# Altium PCB ESP_Circuit2.PcbDoc
Units mm, origin at the board's own origin, x right, y up, seen from the top; angles counter-clockwise.
Board outline 68.58 x 63.5 mm, 2 copper layers (Top Layer, Bottom Layer); 17 components, 19 nets, 64 pads, 0 vias.
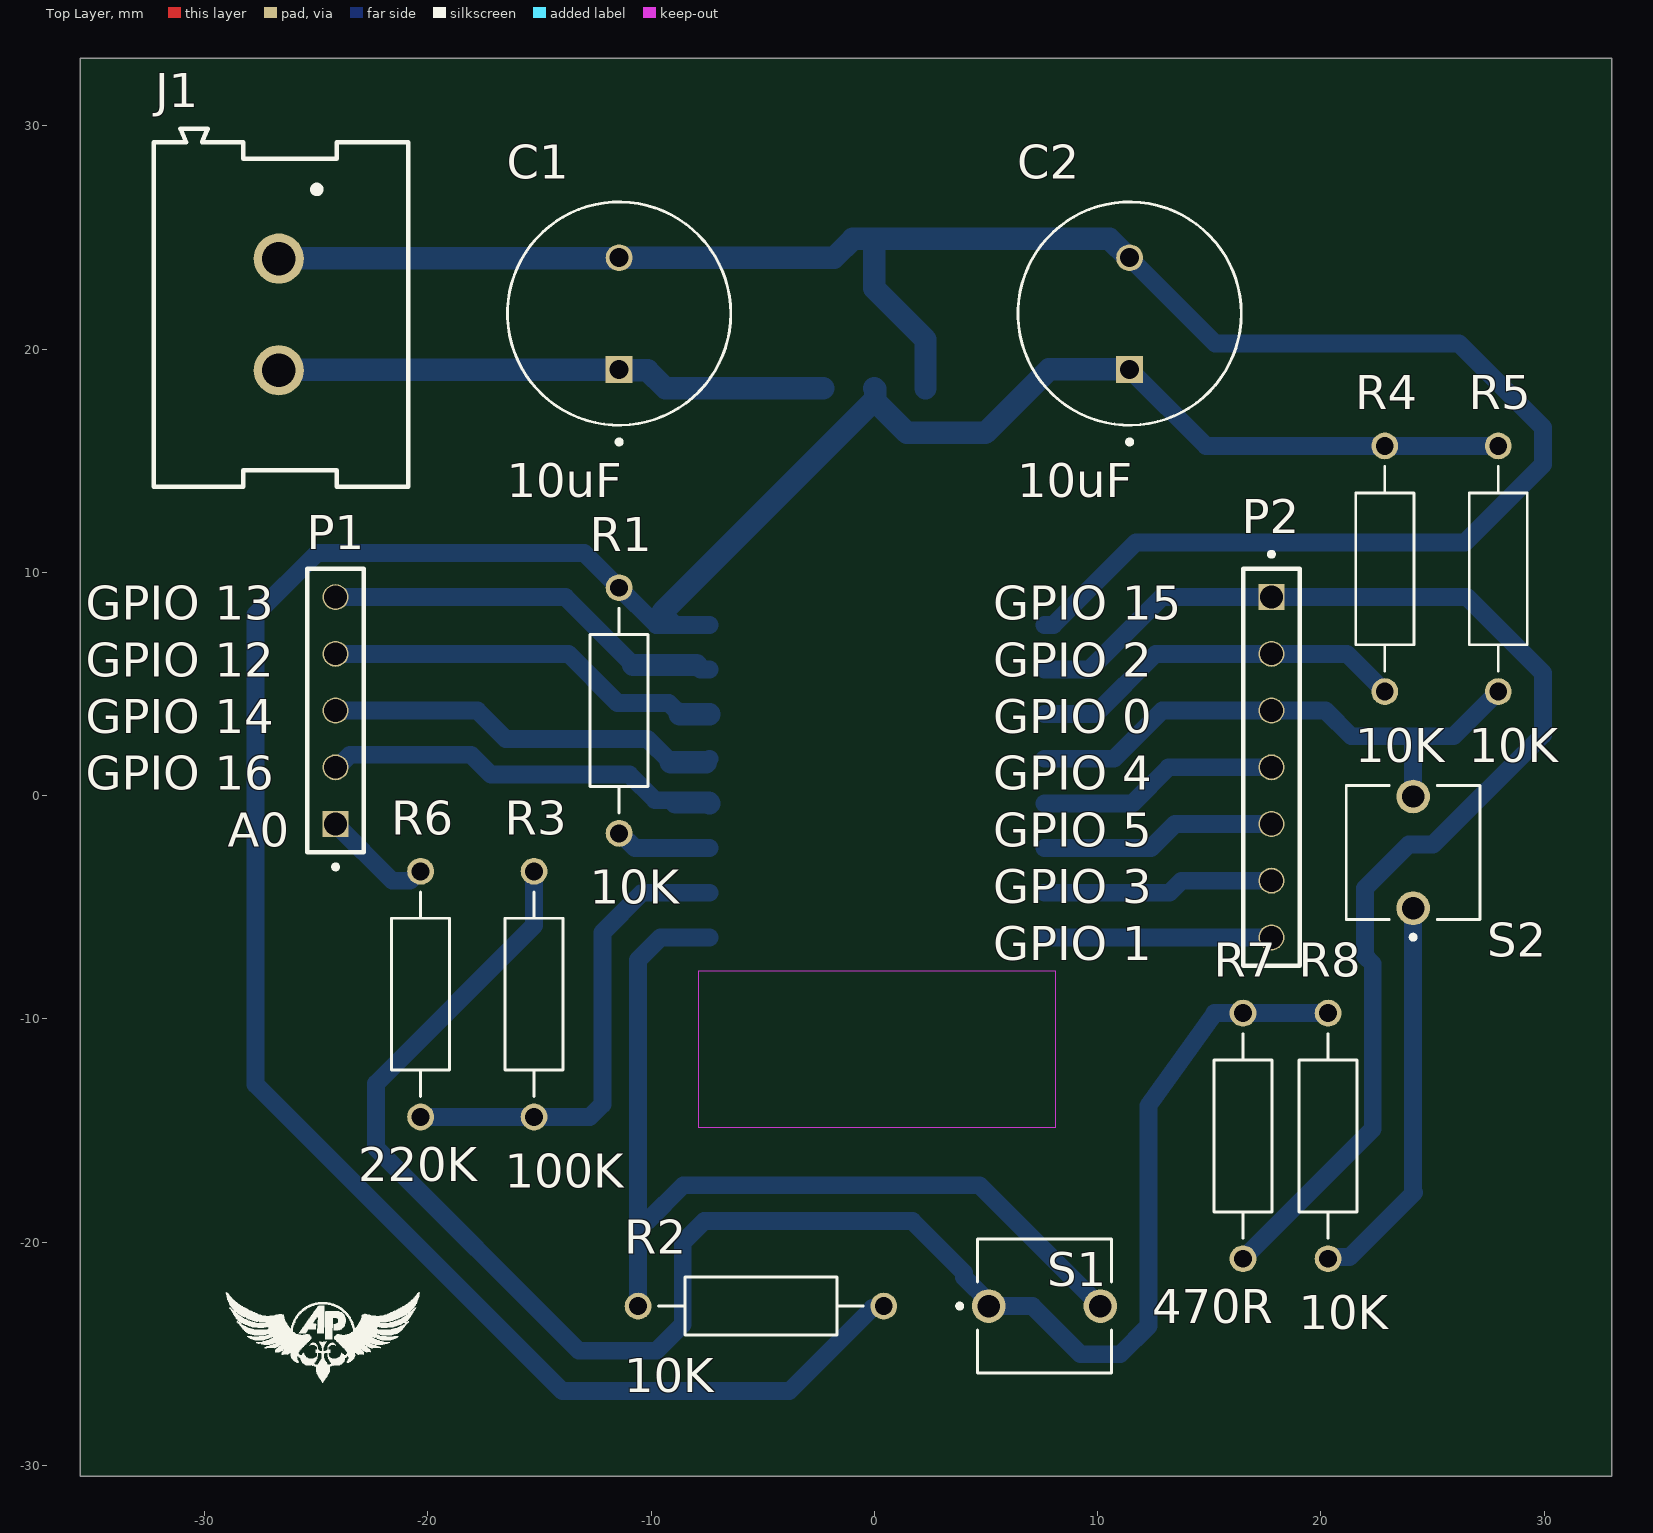
[diagram p0: Top Layer view]
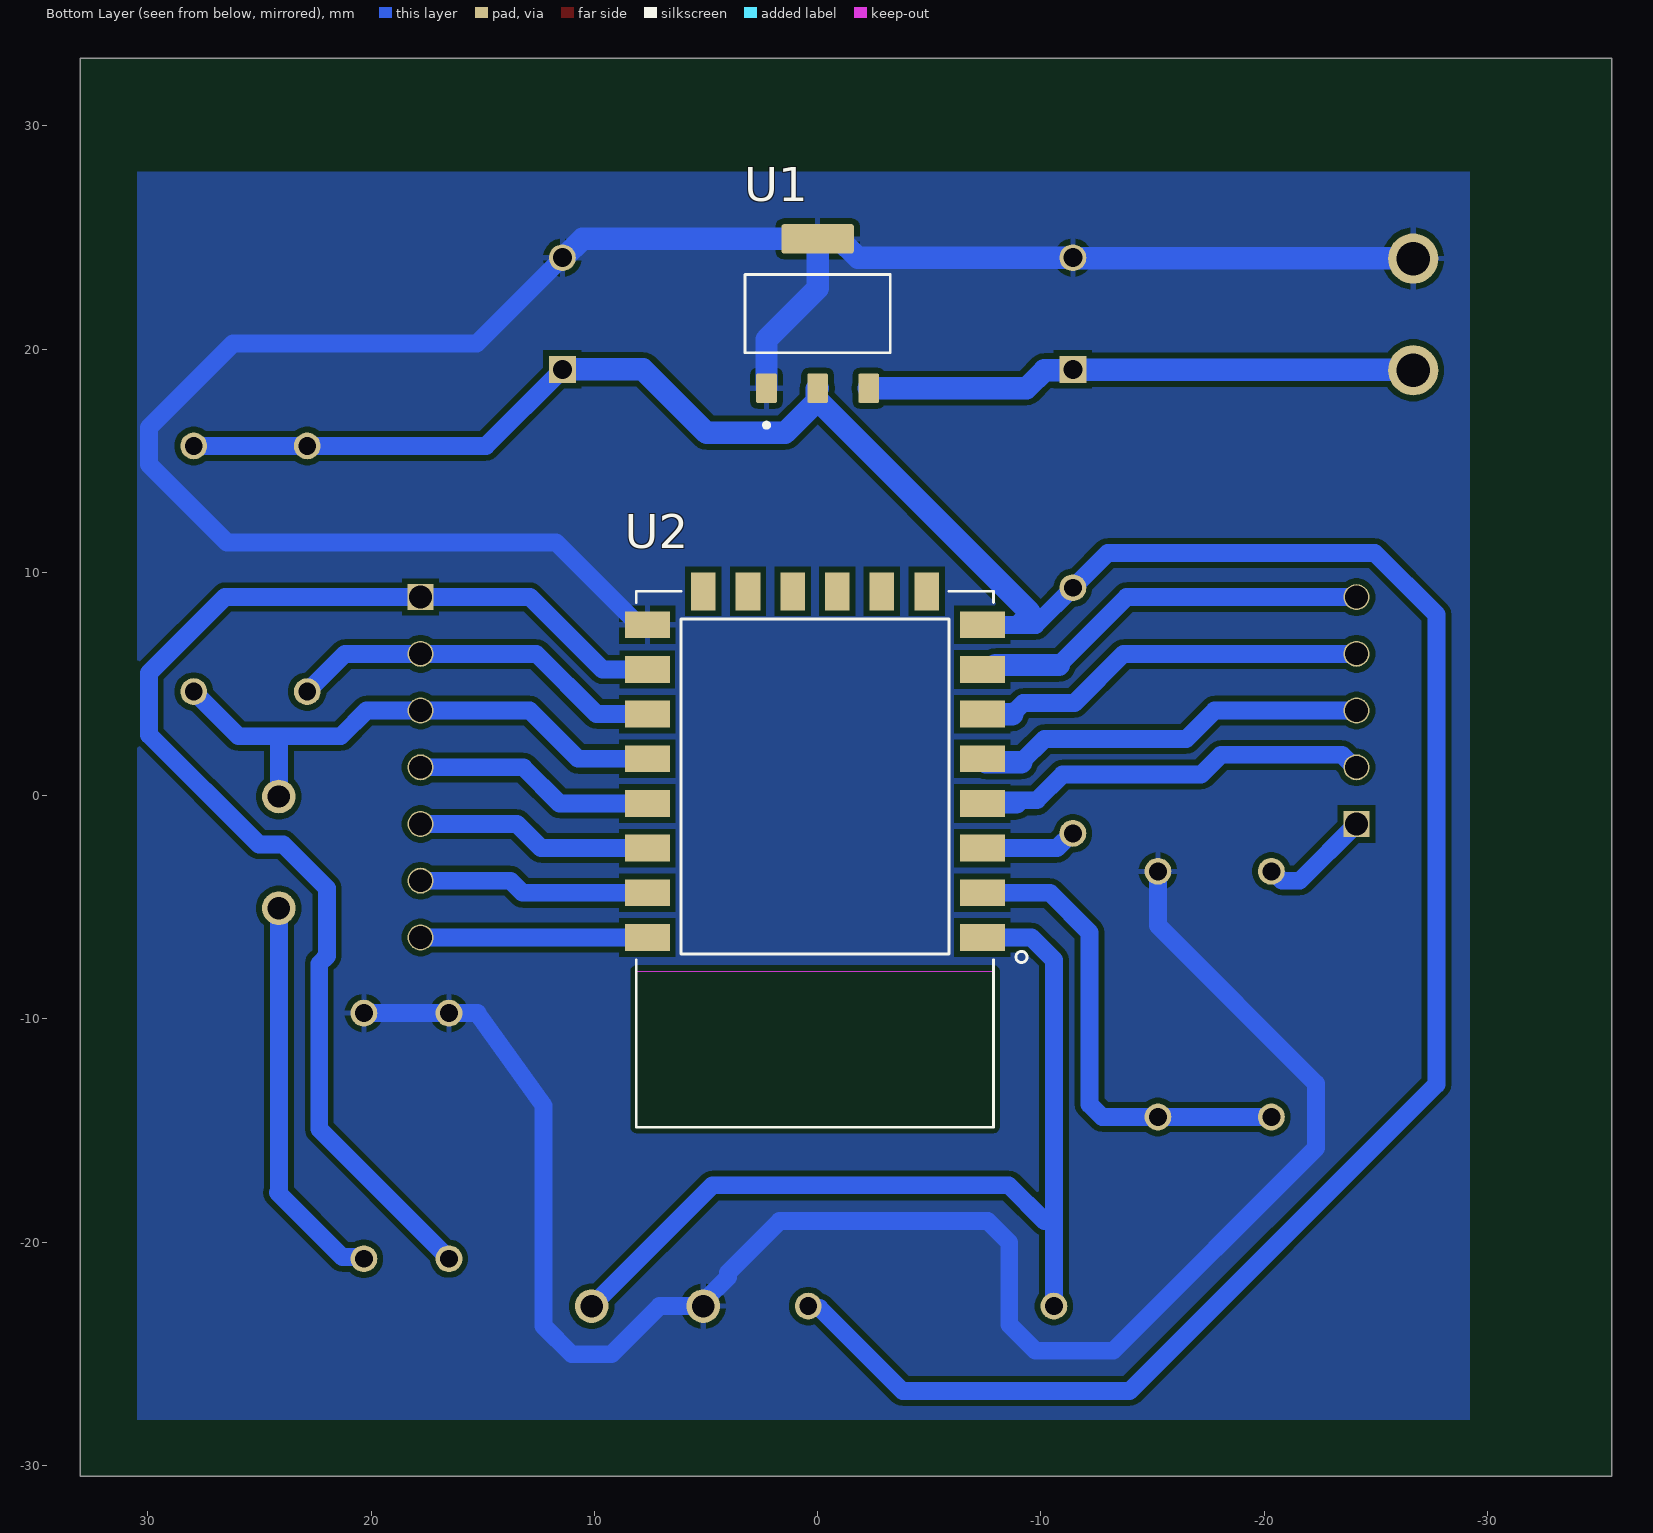
[diagram p1: Bottom Layer view, seen from below]

## Layer stack, top to bottom
Top Solder: solder mask 0.0102, Solder Resist, Dk 3.5
Top Layer: signal copper 0.0356
Dielectric 1: dielectric 0.32, FR-4, Dk 4.8
Bottom Layer: signal copper 0.0356
Bottom Solder: solder mask 0.0102, Solder Resist, Dk 3.5

## Board outline
-35.56,-30.48 33.02,-30.48 33.02,33.02 -35.56,33.02

## Design rules (kind name [scope] priority, off if disabled: settings)
Clearance [All] p1: gap=0.254 ignorepadtopadclearanceinfootprint=TRUE except(0: Arc-Hole Track-Hole SMDPad-Hole THPad-Hole Via-Hole Fill-Hole Poly-Hole Region-Hole Text-Hole; 0.5: Arc-SMDPad Track-SMDPad; 0.8: Arc-Arc Arc-Track Track-Track; 1: Arc-THPad Track-THPad SMDPad-SMDPad SMDPad-THPad THPad-THPad)
PolygonConnect [All] p1: connectstyle=Relief reliefconductorwidth=0.254 reliefentries=4 polygonreliefangle="90 Angle" airgapwidth=0.254
RoutingVias [All] p1: holewidth=0.711 width=1.27 viastyle="Through Hole" minholewidth=0.711 minwidth=1.27 maxholewidth=0.711 maxwidth=1.27
SolderMaskExpansion [All] p1: expansion=0.102 istentingtop=FALSE
Width [All] p1: maxlimit=1.2 minlimit=0.5 preferedwidth=0.8 minimp=50.000000 maximp=50.000000 favimp=50.000000
30 further rules are at their usual default settings.

## Components (designator, comment, footprint, x,y, rotation, side; value= is the part's Value field where it differs from the comment)
C1 "10uF" CAPPRD500W60D1000H2000 -11.43,21.59 r90 top value=10μF
C2 "10uF" CAPPRD500W60D1000H2000 11.43,21.59 r90 top
J1 "691253410002" 691253410002 -26.67,21.55 r270 top
P1 "PinHeader(5 Pins)(Right)" "5 pins connector" -24.13,3.81 r90 top
P2 "PinHeader(7 Pins)(Left)" "7 pins connector" 17.78,1.27 r270 top
R1 "10K" RESAD1100W55L680D260 -11.43,3.81 r90 top
R2 "10K" RESAD1100W55L680D260 -5.08,-22.86 r0 top
R3 "100K" RESAD1100W55L680D260 -15.24,-8.89 r90 top
R4 "10K" RESAD1100W55L680D260 22.86,10.16 r90 top
R5 "10K" RESAD1100W55L680D260 27.94,10.16 r90 top
R6 "220K" RESAD1100W55L680D260 -20.32,-8.89 r270 top
R7 "470R" RESAD1100W55L680D260 16.51,-15.24 r270 top
R8 "10K" RESAD1100W55L680D260 20.32,-15.24 r270 top
S1 "BUTT-2" SW_BUTT-2 7.62,-22.86 r0 top
S2 "BUTT-2" SW_BUTT-2 24.13,-2.54 r90 top
U1 "AMS1117-3.3" SOT229P700X180-4N 0,21.59 r90 bottom
U2 "ESP8266-12E/ESP-12E" XCVR_ESP8266-12E/ESP-12E 0.12,0.65 r0 bottom

## Footprints (in the part's own frame and the unit in brackets; to place one, negate y for a bottom-side part, rotate by r counter-clockwise, add the part's x,y. Pads: shape width x height; smd on the part's side, far side on the other; paste and mask are expansions set on the pad)
"5 pins connector" [mm]
  rect 1.163x1.163 hole 1.02: 01(-5.08,0)
  round 1.163 hole 1.02: 02(-2.54,0) 03(0,0) 04(2.54,0) 05(5.08,0)
  silkscreen extent -7.1,-1.27 6.35,1.27
"7 pins connector" [mm]
  rect 1.163x1.163 hole 1.02: 01(-7.62,0)
  round 1.163 hole 1.02: 02(-5.08,0) 03(-2.54,0) 04(0,0) 05(2.54,0) 06(5.08,0) 07(7.62,0)
  silkscreen extent -9.64,-1.27 8.89,1.27
691253410002 [mm]
  round 2.25 hole 1.5: 1(-2.5,0) 2(2.5,0)
  silkscreen extent -8.32,-5.6 7.72,5.8
CAPPRD500W60D1000H2000 [mm]
  round 1.2 hole 0.85: N(2.5,0)
  rect 1.2x1.2 hole 0.85: P(-2.5,0)
  silkscreen extent -5.85,-5 5,5, body extent -5,-5 5,5, height 20
RESAD1100W55L680D260 [mm]
  round 1.2 hole 0.8: 1(-5.5,0) 2(5.5,0)
  silkscreen extent -4.58,-1.3 4.58,1.3
SOT229P700X180-4N [mm]
  rrect15% 1.31x0.93 smd: 1(-3.345,2.29) 2(-3.345,0) 3(-3.345,-2.29)
  rrect15% 1.31x3.24 smd: 4(3.345,0)
  silkscreen extent -5.1,-3.25 1.75,3.25, body extent -3.5,-3.25 3.5,3.25, height 1.8
SW_BUTT-2 [mm]
  round 1.508 hole 1: 1(-2.5,0) 2(2.5,0)
  silkscreen extent -3.9,-3 3,3
XCVR_ESP8266-12E/ESP-12E [mm]
  rect 2x1.2 smd: 1(-7.5,7) 2(-7.5,5) 3(-7.5,3) 4(-7.5,1) 5(-7.5,-1) 6(-7.5,-3) 7(-7.5,-5) 8(-7.5,-7) 15(7.5,-7) 16(7.5,-5) 17(7.5,-3) 18(7.5,-1) 19(7.5,1) 20(7.5,3) 21(7.5,5) 22(7.5,7)
  rect 1.1x1.7 smd: 9(-5,-8.5) 10(-3,-8.5) 11(-1,-8.5) 12(1,-8.5) 13(3,-8.5) 14(5,-8.5)
  Keep-Out Layer region: 8,8.51 -8.009,8.51 -8.009,15.5 8,15.5
  Keep-Out Layer region: 8,8.51 -8.009,8.51 -8.009,15.5 8,15.5
  silkscreen extent -9.5,-8.5 8,15.5, body extent -7.87,-8.57 8.13,15.43, height 3

## Part data
C1 C2: library part EEUEB2V100B, "Aluminum Electrolytic Capacitors - Radial Leaded 10uF 350volts AEC-Q200", Package="RADIAL-2 Panasonic", Availability="In Stock", Check_prices=https://www.snapeda.com/parts/EEU-EB2V100B/Panasonic/view-part/?ref=eda, MF=Panasonic, MP=EEU-EB2V100B, Price=None, SnapEDA_Link=https://www.snapeda.com/parts/EEU-EB2V100B/Panasonic/view-part/?ref=snap
J1: "7.62 MM TERMINAL BLOCK, HORIZONT", Package=None, Availability="In Stock", Check_prices=https://www.snapeda.com/parts/691253410002/Wurth+Electronics+Inc./view-part/?ref=eda, MF="WÃ¼rth Elektronik", MP=691253410002, Price=None, Purchase-URL=https://pricing.snapeda.com/search?q=691253410002&ref=eda, SnapEDA_Link=https://www.snapeda.com/parts/691253410002/Wurth+Electronics+Inc./view-part/?ref=snap
R1 R2 R3 R4 R5 R6 R7 R8: library part MFR-25FBF52-3K16, "RES 280K OHM 1/4W 1% AXIAL", Package=None, Availability=Unavailable, MP=MFR-25FBF52-3K16, Price=None
S1 S2: "Tactile Switches MINI PUSH BUTTON SWITCH 2-PIN QTY. 4", Package=None, Availability="In Stock", Check_prices=https://www.snapeda.com/parts/BUTT-2/Gravitech/view-part/?ref=eda, MF=Gravitech, MP=BUTT-2, Price=None, Purchase-URL=https://pricing.snapeda.com/search/part/BUTT-2/?ref=eda, SnapEDA_Link=https://www.snapeda.com/parts/BUTT-2/Gravitech/view-part/?ref=snap
U1: "Sot223/Pkg 1-Amp 3.3-Volt Low Drop Out Voltage Regulatator", Package="SOT-223 Seeed Technology", Availability="Not in stock", Check_prices=https://www.snapeda.com/parts/AMS1117-3.3/Advanced+Monolithic+Systems/view-part/?ref=eda, MF="Advanced Monolithic Systems", MP=AMS1117-3.3, Price=None, SnapEDA_Link=https://www.snapeda.com/parts/AMS1117-3.3/Advanced+Monolithic+Systems/view-part/?ref=snap
U2: "This WiFi module has a 32-bit MCU micro and clock speeds supporting 80 MHz or 160 MHz. Supports the RTOS and integrated Wi-Fi MAC/BB/RF/PA/LNA, and has an on-board antenna.", Package=None, Availability="Not in stock", Check_prices=https://www.snapeda.com/parts/ESP8266-12E/ESP-12E/AI-Thinker/view-part/?ref=eda, MF=AI-Thinker, MP=ESP8266-12E/ESP-12E, Price=None, SnapEDA_Link=https://www.snapeda.com/parts/ESP8266-12E/ESP-12E/AI-Thinker/view-part/?ref=snap

## Nets (pads, with @x,y where several pads share a name; then routed paths per layer and width w, separated by ;. In a path a pad name is that pad's centre, name@x,y a point inside that pad or via, vN(x,y) a via of type N, cw(c..) or ccw(c..) an arc to the next point about the centre after c; other vN are vias at no path point)
+3V3: C2.P R1.2 R2.2 R4.2 R5.2 U1.2 U2.8 | length 125.3
  Bottom Layer w0.8: -9.488,8.218 -8.92,7.65 ; U2.8 -8.92,7.65 ; R2.2 0.343,-22.937 -0.077,-22.937 -3.81,-26.67 -13.97,-26.67 -27.711,-12.929 -27.711,8.111 -24.951,10.871 -12.991,10.871 R1.2 -9.77,7.65 -8.92,7.65 ; C2.P 14.86,15.66 R4.2 R5.2
  Bottom Layer w1: -9.488,8.218 0.025,17.732 U1.2@0.035,17.672 ; U1.2 0.035,18.21 U1.2@0.035,17.672 ; C2.P 7.818,19.09 4.973,16.245 1.462,16.245 U1.2@0.035,17.672
+5V0: C1.P J1.2 U1.3 | length 24.7
  Bottom Layer w1: J1.2 -26.65,19.07 -11.45,19.07 C1.P -11.384,19.044 -10.154,19.044 -9.355,18.245 U1.3
GND: C1.N C2.N J1.1 R3.2 R7.1 R8.1 S1.1 U1.1 U1.4 U2.15 | length 176.6
  Bottom Layer w0.8: R3.2 -15.24,-5.818 -22.32,-12.898 -22.32,-15.78 -13.24,-24.86 -9.752,-24.86 -8.58,-23.688 -8.58,-20.01 -7.62,-19.05 1.701,-19.05 4.02,-21.369 4.02,-21.568 5.12,-22.668 S1.1 ; S1.1 7.074,-22.86 9.228,-25.014 11.012,-25.014 12.274,-23.752 12.274,-13.885 15.239,-9.742 ; U2.15 8.02,7.65 11.711,11.341 26.449,11.341 29.94,14.832 29.94,16.488 26.177,20.251 15.269,20.251 C2.N ; 15.239,-9.741 15.24,-9.74 R8.1
  Bottom Layer w1: J1.1 -26.65,24.07 -11.45,24.07 C1.N -1.81,24.09 -0.965,24.935 U1.4 ; U1.1 2.29,20.428 0,22.718 U1.4 ; C2.N 11.376,24.09 10.531,24.935 U1.4
NetP1_01: P1.01 R6.1 | length 5
  Bottom Layer w0.8: P1.01 -21.59,-3.81 -20.794,-3.81 -20.374,-3.39 R6.1
NetP1_02: P1.02 U2.4 | length 17.9
  Bottom Layer w0.8: P1.02 -24.039,1.27 -23.48,1.829 -18.061,1.829 -17.173,0.94 -10.964,0.94 -9.816,-0.209 -8.99,-0.209 -8.89,-0.309
  Bottom Layer w1: -8.89,-0.309 -7.421,-0.309 U2.4
NetP1_03: P1.03 U2.5 | length 17.8
  Bottom Layer w0.8: P1.03 -17.78,3.81 -16.51,2.54 -10.16,2.54 -9.111,1.491 ; U2.5@-7.539,1.491 U2.5
  Bottom Layer w1: -9.111,1.491 U2.5@-7.539,1.491
NetP1_04: P1.04 U2.6 | length 17.9
  Bottom Layer w0.8: P1.04 -13.703,6.35 -11.503,4.15 -9.209,4.15 -8.709,3.65
  Bottom Layer w1: -8.709,3.65 U2.6
NetP1_05: P1.05 U2.7 | length 18.1
  Bottom Layer w0.8: P1.05 -13.838,8.89 -10.798,5.85 ; U2.7@-7.98,5.85 -7.78,5.65 U2.7
  Bottom Layer w1: -10.798,5.85 U2.7@-7.98,5.85
NetP2_01: P2.01 R7.2 U2.16 | length 57.8
  Bottom Layer w0.8: U2.16 9.64,5.65 12.88,8.89 P2.01 26.538,8.89 29.94,5.488 29.94,2.724 25.022,-2.194 23.93,-2.194 21.976,-4.148 21.976,-7.186 22.32,-7.53 22.32,-14.93 R7.2
NetP2_02: P2.02 R4.1 U2.17 | length 17.1
  Bottom Layer w0.8: U2.17 9.903,3.65 12.603,6.35 P2.02 21.17,6.35 R4.1
NetP2_03: P2.03 R5.1 S2.2 U2.18 | length 25.3
  Bottom Layer w0.8: U2.18 10.731,1.65 12.891,3.81 P2.03 20.208,3.81 21.358,2.66 24.13,2.66 ; S2.2 24.13,2.66 ; R5.1@27.94,4.574 R5.1 25.94,2.66 24.13,2.66
NetP2_04: P2.04 U2.19 | length 10.8
  Bottom Layer w0.8: U2.19 11.56,-0.35 13.18,1.27 P2.04
NetP2_05: P2.05 U2.20 | length 10.6
  Bottom Layer w0.8: U2.20 12.388,-2.35 13.468,-1.27 P2.05
NetP2_06: P2.06 U2.21 | length 10.4
  Bottom Layer w0.8: U2.21 13.216,-4.35 13.756,-3.81 P2.06
NetP2_07: P2.07 U2.22 | length 10.2
  Bottom Layer w0.8: U2.22 P2.07
NetR1_1: R1.1 U2.3 | length 4.3
  Bottom Layer w0.8: R1.1 -11.376,-1.69 -10.716,-2.35 U2.3
NetR2_1: R2.1 S1.2 U2.1 | length 42.7
  Bottom Layer w0.8: R2.1 -10.58,-19.05 ; U2.1 -9.574,-6.35 -10.58,-7.356 -10.58,-19.05 ; S1.2 4.71,-17.45 -8.56,-17.45 -10.16,-19.05 -10.58,-19.05
NetR3_1: R3.1 R6.2 U2.2 | length 21.6
  Bottom Layer w0.8: R6.2 R3.1 -12.746,-14.39 -12.18,-13.824 -12.18,-6.127 -10.403,-4.35 U2.2
NetR8_2: R8.2 S2.1 | length 17.8
  Bottom Layer w0.8: R8.2 20.397,-20.663 21.287,-20.663 24.17,-17.78 24.13,-17.74 S2.1
pads on no net: U2.9 U2.10 U2.11 U2.12 U2.13 U2.14

## Polygon pours and split planes (outlines as drawn)
GND on Bottom Layer "GND_L02_P000" (solid, pour order 0): -29.21,27.94 -29.21,-27.94 30.48,-27.94 30.48,27.94

## Silkscreen, mask and mechanical layers (free items; w line width, h text height)
Top Overlay:
  drawing of 2 lines, arcs and shapes, not listed
  text "GPIO 13" at -35.306,7.874 h1.52
  text "GPIO 15" at 5.334,7.874 h1.52
  text "GPIO 12" at -35.306,5.334 h1.52
  text "GPIO 2" at 5.334,5.334 h1.52
  text "GPIO 14" at -35.306,2.794 h1.52
  text "GPIO 0" at 5.334,2.794 h1.52
  text "GPIO 16" at -35.306,0.254 h1.52
  text "GPIO 4" at 5.334,0.254 h1.52
  text "A0" at -28.956,-2.286 h1.52
  text "GPIO 5" at 5.334,-2.286 h1.52
  text "GPIO 3" at 5.334,-4.826 h1.52
  text "GPIO 1" at 5.334,-7.366 h1.52
Mechanical 1:
  lines w0.254: -41.148,-28.806 -40.64,-30.33 ; -41.148,31.646 -40.64,33.17 ; -40.894,-30.33 -40.386,-30.33 ; -40.894,33.17 -40.386,33.17 ; -40.64,-5.08 -40.64,-30.33 ; -40.64,7.921 -40.64,33.17 ; -40.132,-28.806 -40.64,-30.33 ; -40.132,31.646 -40.64,33.17 ; -35.385,-34.747 -35.385,-34.239 ; -33.861,-35.001 -35.385,-34.493 ; -33.861,-33.985 -35.385,-34.493 ; -8.992,-34.493 -35.385,-34.493 ; 7.056,-34.493 33.449,-34.493 ; 31.925,-35.001 33.449,-34.493 ; 31.925,-33.985 33.449,-34.493 ; 33.449,-34.747 33.449,-34.239
  text "63.5 (mm)" at -39.726,-4.826 h1.52 r90
  text "68.834 (mm)" at -8.738,-35.408 h1.52